# Altium PCB BridgeBoardNoRC.PcbDoc
Units mil, origin at the board's own origin, x right, y up, seen from the top; angles counter-clockwise.
Board outline 3900.03 x 2110.03 mil, 2 copper layers (Top Layer, Bottom Layer); 7 components, 69 nets, 168 pads, 0 vias.
Unrouted connection lines stored in the file: 85.
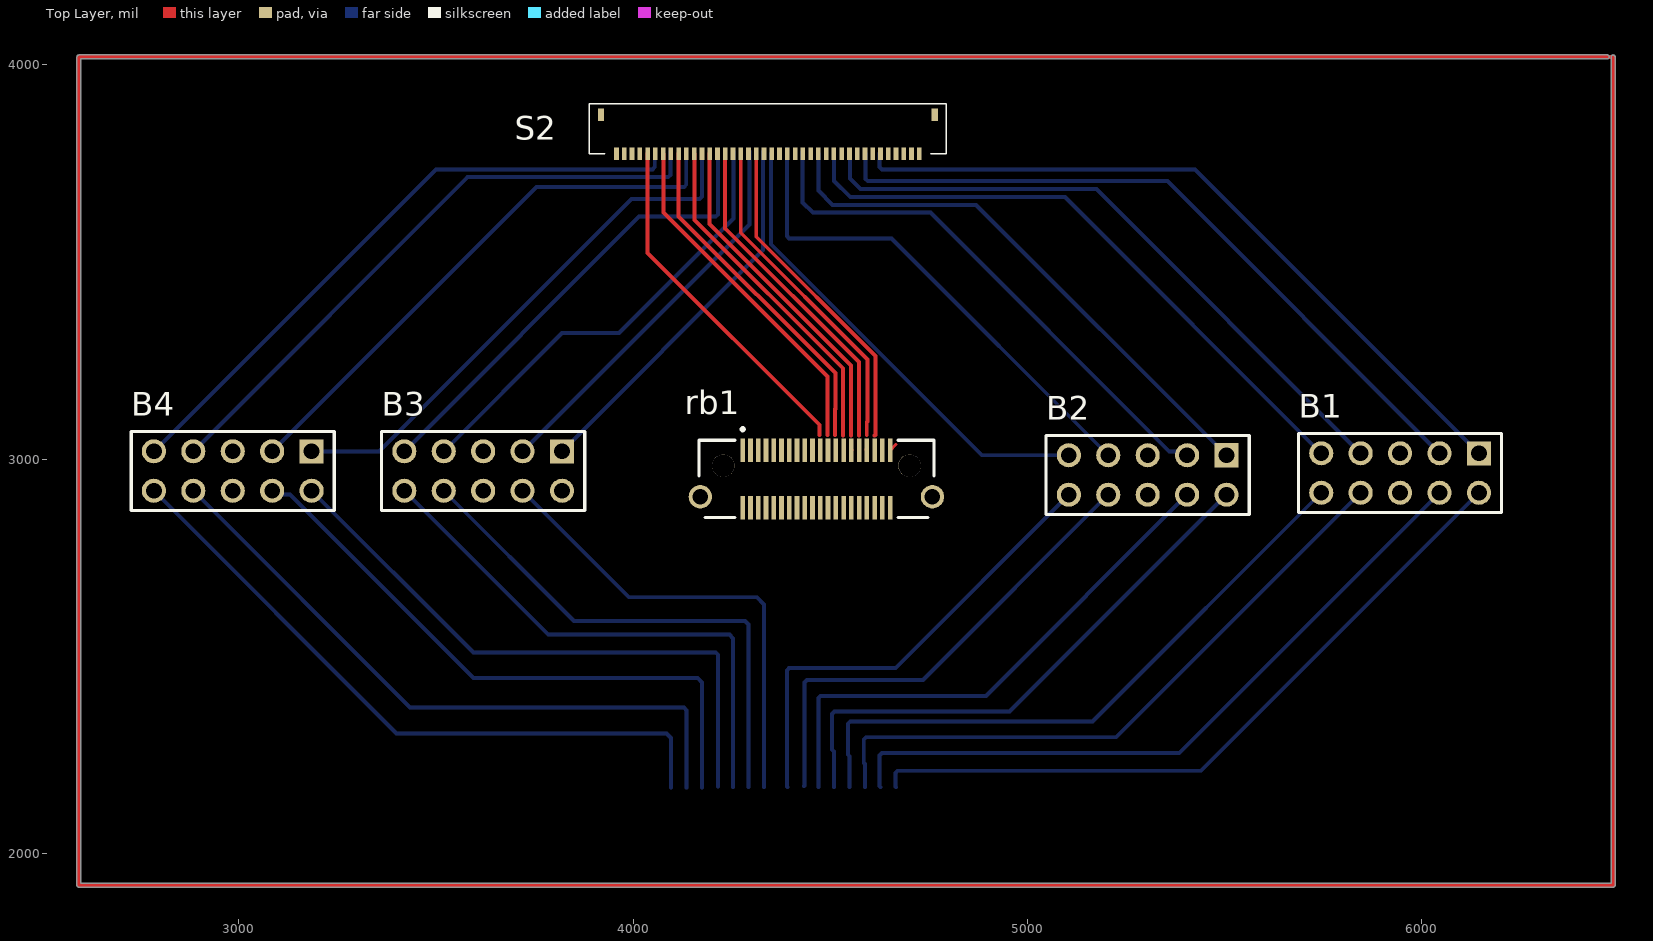
[diagram p0: Top Layer view]
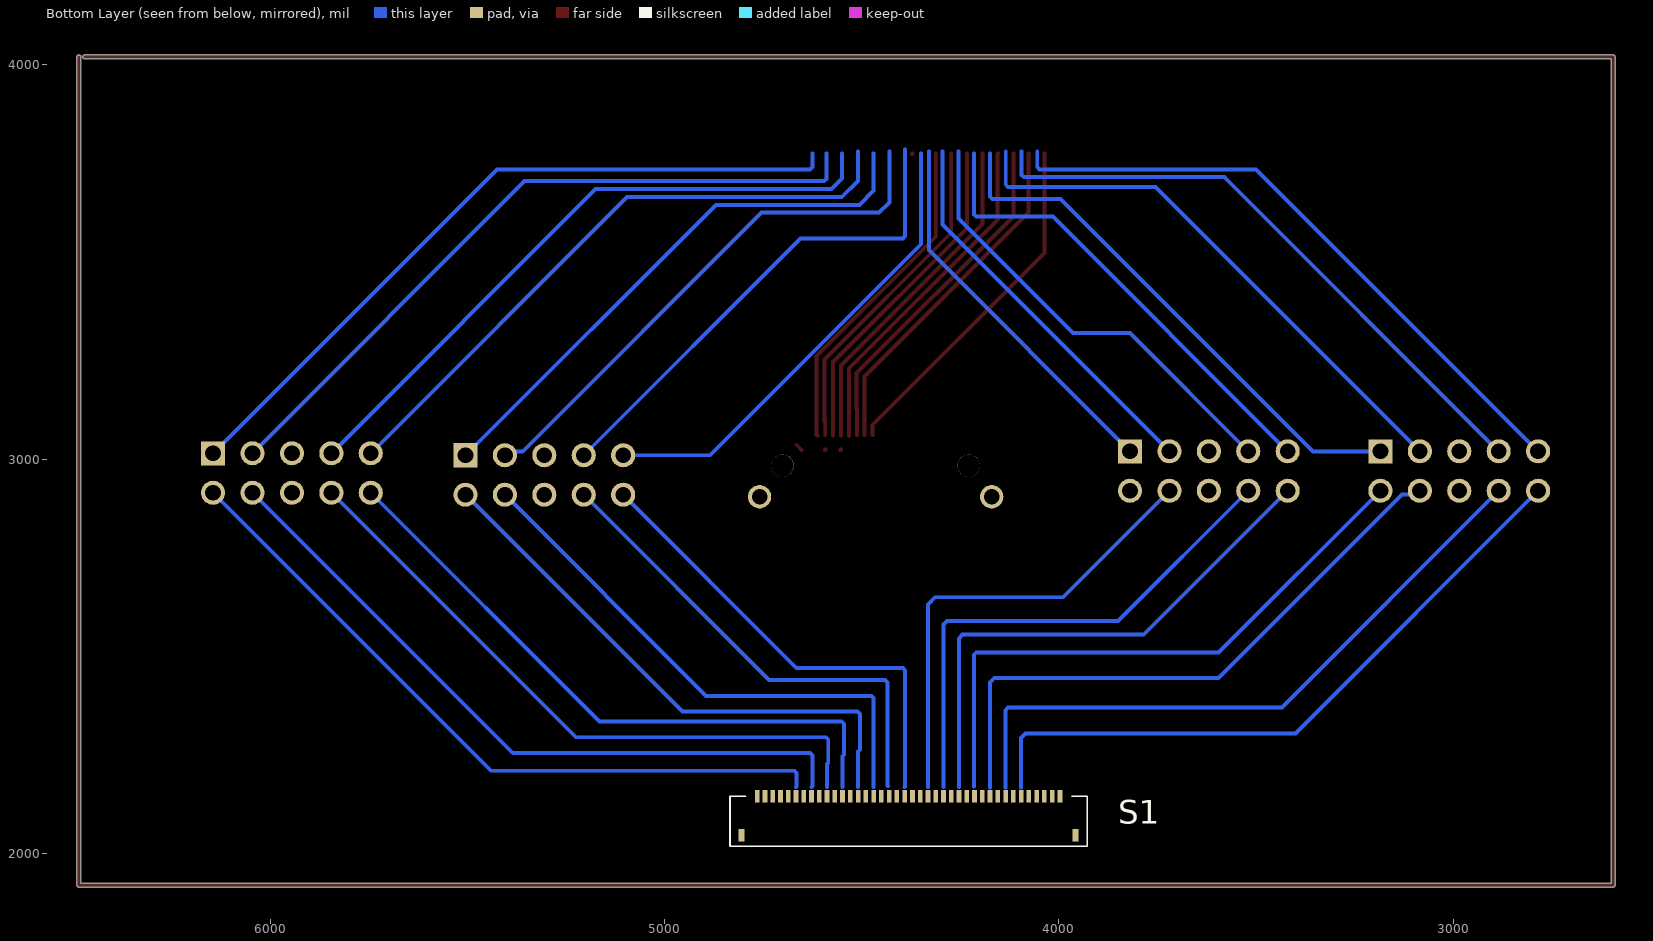
[diagram p1: Bottom Layer view, seen from below]

## Layer stack, top to bottom
Top Solder: solder mask 0.4, Solder Resist, Dk 3.5
Top Layer: signal copper 1.4
Dielectric 1: dielectric 12.6, FR-4, Dk 4.8
Bottom Layer: signal copper 1.4
Bottom Solder: solder mask 0.4, Solder Resist, Dk 3.5

## Board outline
2589.99,1920 2589.99,4020 cw(c2595,4020) 2595,4025.01 6470,4025.01 cw(c6470,4020) 6475.02,4020 cw(c6470,4020) 6470,4014.99 2600.01,4014.99 2600.01,1925.02 6479.98,1925.02 6479.98,4020 cw(c6485,4020) 6490.02,4020 6490.02,1920 cw(c6485,1920) 6485,1914.98 2595,1914.98 cw(c2595,1920)

## Design rules (kind name [scope] priority, off if disabled: settings)
Clearance [All] p1: gap=10 ignorepadtopadclearanceinfootprint=FALSE except(0: Arc-Hole Track-Hole SMDPad-Hole THPad-Hole Via-Hole Fill-Hole Poly-Hole Region-Hole Text-Hole)
PolygonConnect [All] p1: connectstyle=Relief reliefconductorwidth=10 reliefentries=4 polygonreliefangle="90 Angle" airgapwidth=10
RoomDefinition BoardForIV [InComponentClass('BoardForIV')] p1: confinementstyle=ConfineIn formatcopy=TRUE lockcomponents=FALSE outline 2600,1920 6485,1920 6485,4020 2600,4020
RoutingVias [All] p1: holewidth=28 width=50 viastyle="Through Hole" minholewidth=28 minwidth=50 maxholewidth=28 maxwidth=50
SolderMaskExpansion [All] p1: expansion=4 istentingtop=FALSE
Width [All] p1: maxlimit=10 minlimit=10 preferedwidth=10
30 further rules are at their usual default settings.

## Classes and differential pairs
component class BoardForIV: B1 B2 B4 rb1 S1 S2

## Components (designator, comment, footprint, x,y, rotation, side; value= is the part's Value field where it differs from the comment)
B1 "TSW-105-05-F-D" SMTC-TSW-105-05-X-D 6145,3015 r180 top
B2 "TSW-105-05-F-D" SMTC-TSW-105-05-X-D 5505,3010 r180 top
B3 "TSW-105-05-F-D" SMTC-TSW-105-05-X-D 3820,3020 r180 top
B4 "TSW-105-05-F-D" SMTC-TSW-105-05-X-D 3185,3020 r180 top
rb1 "LSHM-120-02.5-L-DV-A-S-K-TR" SAMTEC_LSHM-120-02.5-L-DV-A-S-TR 4465,2950 r180 top
S1 "AYF534065T" AYF534065T 4381.41,2091.85 r180 bottom
S2 "AYF534065T" AYF534065T 4342.01,3828.15 r180 top

## Footprints (in the part's own frame and the unit in brackets; to place one, negate y for a bottom-side part, rotate by r counter-clockwise, add the part's x,y. Pads: shape width x height; smd on the part's side, far side on the other; paste and mask are expansions set on the pad)
AYF534065T [mm]
  rect 0.3x0.8 smd: 1(-9.75,1.35) 2(-9.25,1.35) 3(-8.75,1.35) 4(-8.25,1.35) 5(-7.75,1.35) 6(-7.25,1.35) 7(-6.75,1.35) 8(-6.25,1.35) 9(-5.75,1.35) 10(-5.25,1.35) 11(-4.75,1.35) 12(-4.25,1.35) 13(-3.75,1.35) 14(-3.25,1.35) 15(-2.75,1.35) 16(-2.25,1.35) 17(-1.75,1.35) 18(-1.25,1.35) 19(-0.75,1.35) 20(-0.25,1.35) 21(0.25,1.35) 22(0.75,1.35) 23(1.25,1.35) 24(1.75,1.35) 25(2.25,1.35) 26(2.75,1.35) 27(3.25,1.35) 28(3.75,1.35) 29(4.25,1.35) 30(4.75,1.35) 31(5.25,1.35) 32(5.75,1.35) 33(6.25,1.35) 34(6.75,1.35) 35(7.25,1.35) 36(7.75,1.35) 37(8.25,1.35) 38(8.75,1.35) 39(9.25,1.35) 40(9.75,1.35)
  rect 0.4x0.8 smd: MP1(-10.75,-1.15) MP2(10.75,-1.15)
  silkscreen extent -11.5,-1.85 11.5,1.35
SAMTEC_LSHM-120-02.5-L-DV-A-S-TR [mm]
  rect 0.3x1.5 smd: 01(4.75,-1.85) 02(4.75,1.85) 03(4.25,-1.85) 04(4.25,1.85) 05(3.75,-1.85) 06(3.75,1.85) 07(3.25,-1.85) 08(3.25,1.85) 09(2.75,-1.85) 10(2.75,1.85) 11(2.25,-1.85) 12(2.25,1.85) 13(1.75,-1.85) 14(1.75,1.85) 15(1.25,-1.85) 16(1.25,1.85) 17(0.75,-1.85) 18(0.75,1.85) 19(0.25,-1.85) 20(0.25,1.85) 21(-0.25,-1.85) 22(-0.25,1.85) 23(-0.75,-1.85) 24(-0.75,1.85) 25(-1.25,-1.85) 26(-1.25,1.85) 27(-1.75,-1.85) 28(-1.75,1.85) 29(-2.25,-1.85) 30(-2.25,1.85) 31(-2.75,-1.85) 32(-2.75,1.85) 33(-3.25,-1.85) 34(-3.25,1.85) 35(-3.75,-1.85) 36(-3.75,1.85) 37(-4.25,-1.85) 38(-4.25,1.85) 39(-4.75,-1.85) 40(-4.75,1.85)
  round 1.5 hole 1: S1(-7.475,1.15) S2(7.475,1.15)
  round 1.45 hole 1.45 unplated: ""(-6,-0.85) ""(6,-0.85)
  silkscreen extent -7.57,-3.3 7.57,2.49
SMTC-TSW-105-05-X-D [mm] ".025 SQ Post Terminal Strip Assembly, 2x5 Pins, Vertical, 2.54mm Pitch, Male"
  rect 1.55x1.55 hole 1.02: 1(0,0)
  round 1.55 hole 1.02: 2(0,2.54) 3(2.54,0) 4(2.54,2.54) 5(5.08,0) 6(5.08,2.54) 7(7.62,0) 8(7.62,2.54) 9(10.16,0) 10(10.16,2.54)
  silkscreen extent -1.46,-1.27 11.62,3.81, body extent -1.27,-1.27 11.43,3.81, height 5.21

## Part data
B1 B2 B3 B4: library part CMP-1024-00360-1, "0.025\" SQ Post Header, Through-hole, Vertical, -55 to 125 degC, 2.54 mm Pitch, 10-Pin, Male, RoHS", Manufacturer=Samtec, Temperature Range="-55 to 125 degC", ComponentLink1Description="Manufacturer URL", ComponentLink1URL=http://www.samtec.com, ComponentLink2Description=Datasheet, ComponentLink2URL=http://www.samtec.com/documents/webfiles/pdf/TSW_TH.PDF, ComponentLink3Description="Package Specification", ComponentLink3URL=http://www.samtec.com/documents/webfiles/cpdf/TSW-XXX-XX-XXX-X-XX-XXX-MKT.pdf, DatasheetVersion=F-214, Mounting Technology=Through-hole, Orientation=Vertical, PackageDescription=".025[0.64] SQ. Post Terminal Strip Assembly", PackageReference=TSW-105-05-X-D, PackageVersion="DM, 8/1988", PartNumber=TSW-105-05-F-D, Pitch="2.54 mm", RoHS=True
rb1: "razor beam 40"
S1 S2: library part AYF534035

## Nets (pads, with @x,y where several pads share a name; then routed paths per layer and width w, separated by ;. In a path a pad name is that pad's centre, name@x,y a point inside that pad or via, vN(x,y) a via of type N, cw(c..) or ccw(c..) an arc to the next point about the centre after c; other vN are vias at no path point)
GND: B1.5 B1.6 B2.5 B2.6 B3.5 B3.6 B4.5 B4.6 S1.1 S1.2 S1.3 S1.37 S1.40 S1.MP1 S1.MP2 S2.1 S2.2 S2.3 S2.37 S2.40 S2.MP1 S2.MP2
S1_A1: rb1.19 S1.5
S1_A2: rb1.17 S1.7
S1_A3: rb1.15 S1.9
S1_A4: rb1.13 S1.11
S1_A5: rb1.11 S1.13
S1_A6: S1.15
S1_A7: S1.17
S1_A8: S1.19
S1_A9: rb1.20 S1.22
S1_A10: rb1.18 S1.24
S1_A11: rb1.16 S1.26
S1_A12: rb1.14 S1.28
S1_A13: rb1.12 S1.30
S1_A14: rb1.10 S1.32
S1_A15: S1.34
S1_A16: S1.36
S1_K1: B1.2 S1.6 | length 1811.2
  Bottom Layer w10: 4666.84,2168.18 4665,2170.02 4665,2204.14 4670.86,2210 5440,2210 B1.2
S1_K2: B1.4 S1.8 | length 1777.8
  Bottom Layer w10: 4627.47,2168.18 4625,2170.65 4625,2249.14 4630.86,2255 5385,2255 B1.4
S1_K3: B1.8 S1.10 | length 1641.5
  Bottom Layer w10: 4588.1,2168.18 4588.1,2227.11 4585,2230.21 4585,2289.14 4590.86,2295 5225,2295 B1.8
S1_K4: B1.10 S1.12 | length 1605.2
  Bottom Layer w10: 4548.73,2168.18 4548.73,2246.8 4545,2250.53 4545,2329.14 4550.86,2335 5165,2335 B1.10
S1_K5: B2.2 S1.14 | length 1418
  Bottom Layer w10: 4509.36,2168.18 4509.36,2258.98 4505,2263.34 4505,2354.14 4510.86,2360 4955,2360 B2.2
S1_K6: B2.4 S1.16 | length 1374.6
  Bottom Layer w10: 4470,2168.19 4470,2394.14 4475.86,2400 4895,2400 B2.4
S1_K7: B2.8 S1.18 | length 1230.5
  Bottom Layer w10: 4433.72,2171.28 4435,2172.56 4435,2434.14 4440.86,2440 4735,2440 B2.8
S1_K8: B2.10 S1.20 | length 1196.9
  Top Layer w10: B2.10@5104.49,2909.49 B2.10
  Bottom Layer w10: 4391.25,2168.18 4390,2169.43 4390,2464.14 4395.86,2470 4665,2470 B2.10
S1_K9: B3.2 S1.21
S1_K10: B3.4 S1.23 | length 1195.3
  Bottom Layer w10: B3.4 3990,2650 4314.14,2650 4332.2,2631.94 4332.2,2168.18
S1_K11: B3.8 S1.25 | length 1334.3
  Bottom Layer w10: B3.8@3528.09,2920 B3.8 3850,2590 4284.14,2590 4292.83,2581.31 4292.83,2168.18
S1_K12: B3.10 S1.27 | length 1366
  Bottom Layer w10: B3.10 3785,2555 4244.14,2555 4253.46,2545.68 4253.46,2168.18
S1_K13: B4.2 S1.29 | length 1536.4
  Bottom Layer w10: B4.2 3595,2510 4209.14,2510 4215,2504.14 4215,2170
S1_K14: B4.4 S1.31 | length 1557.8
  Bottom Layer w10: B4.4 3094.76,2910.24 3130.4,2910.24 3595.64,2445 4164.14,2445 4175.2,2433.94 4175.2,2167.69
S1_K15: B4.8 S1.33 | length 1677
  Bottom Layer w10: B4.8 3435,2370 4129.14,2370 4135.83,2363.31 4135.83,2167.7
S1_K16: B4.10 S1.35 | length 1710.6
  Top Layer w10: B4.10 B4.10@2794.76,2929.76
  Bottom Layer w10: B4.10 3400,2305 4085,2305 4096.46,2293.54 4096.46,2167.7
S2_A1: rb1.36 S2.5
S2_A2: rb1.34 S2.7
S2_A3: rb1.32 S2.9
S2_A4: rb1.30 S2.11
S2_A5: rb1.28 S2.13
S2_A6: rb1.26 S2.15
S2_A7: rb1.24 S2.17
S2_A8: rb1.22 S2.19 | length 1.7
  Top Layer w10: S2.19 S2.19@4372.76,3773.78
S2_A9: rb1.35 S2.22 | length 841.1
  Top Layer w10: S2.22 4312.48,3563.99 4614.53,3261.94 4614.53,3061.69 4612.64,3059.8
S2_A10: rb1.33 S2.24 | length 850.1
  Top Layer w7: rb1.33 rb1.33@4593.23,3023.11
  Top Layer w10: S2.24 4273.11,3574.22 4594.53,3252.8 4594.53,3095.98 4592.64,3094.09 4592.64,3060.92 ; rb1.33@4591.73,3024.06 rb1.33
S2_A11: rb1.31 S2.26 | length 855.8
  Top Layer w10: S2.26 4233.74,3585.3 4572.95,3246.09 4572.95,3102.69 4572.64,3102.38 4572.64,3059.8
S2_A12: rb1.29 S2.28 | length 865.3
  Top Layer w10: S2.28 4194.37,3596.39 4552.95,3237.81 4552.95,3110.98 4552.64,3110.66 4552.64,3060.13 ; rb1.29@4552.36,3024.06 rb1.29
S2_A13: rb1.27 S2.30 | length 871.1
  Top Layer w10: S2.30 4156.22,3773.78 4156.22,3606.25 4532.95,3229.52 4532.95,3119.26 4532.64,3118.95 4532.64,3060.62
S2_A14: rb1.25 S2.32 | length 878.6
  Top Layer w10: S2.32 4115.63,3615.45 4512.95,3218.12 4512.95,3127.55 4512.64,3127.23 4512.64,3061.08
S2_A15: rb1.23 S2.34 | length 886.2
  Top Layer w10: S2.34 4077.48,3773.78 4077.48,3625.31 4492.95,3209.84 4492.95,3135.83 4492.64,3135.52 4492.64,3061.51
S2_A16: rb1.21 S2.36 | length 893.6
  Top Layer w10: S2.36 4036.89,3523.11 4472.64,3087.36 4472.64,3061.9
S2_K1: B1.1 S2.6 | length 1854.8
  Bottom Layer w10: 4625,3775 4625,3740.86 4630.86,3735 5425,3735 B1.1
S2_K2: B1.3 S2.8 | length 1821.6
  Top Layer w10: B1.3@6035.24,3024.76 B1.3
  Bottom Layer w10: 4590,3775.43 4590,3710.86 4595.86,3705 5355,3705 B1.3
S2_K3: B1.7 S2.10 | length 1646.9
  Bottom Layer w10: 4550,3775 4550,3711.72 4576.72,3685 5175,3685 B1.7
S2_K4: B1.9 S2.12 | length 1595.3
  Bottom Layer w10: 4510,3780 4510,3705.86 4550.86,3665 5095,3665 B1.9
S2_K5: B2.1 S2.14 | length 1407
  Bottom Layer w10: 4470,3775 4470,3680.86 4505.86,3645 4870,3645 B2.1
S2_K6: B2.3 S2.16 | length 1369.6
  Bottom Layer w10: 4430,3780 4430,3650.86 4455.86,3625 4754.36,3625 5359.6,3019.76 5395.24,3019.76 B2.3
S2_K7: B2.7 S2.18 | length 1278.2
  Top Layer w10: B2.7@5195.24,3019.76 B2.7
  Bottom Layer w10: 4390,3785 4390,3565.86 4395.86,3560 4655,3560 B2.7
S2_K8: B2.9 S2.20 | length 1206.6
  Bottom Layer w10: 4350,3775 4350,3545 4885,3010 B2.9
S2_K9: B3.1 S2.21 | length 971.2
  Bottom Layer w10: B3.1 4330,3530 4330,3780
S2_K10: B3.3 S2.23 | length 998.2
  Bottom Layer w10: B3.3 4295,3595 4295,3780
S2_K11: B3.7 S2.25 | length 1148.9
  Bottom Layer w10: B3.7 3820.31,3320.31 3964.45,3320.31 4255,3610.86 4255,3780
S2_K12: B3.9 S2.27 | length 1211.8
  Top Layer w10: B3.9 B3.9@3429.76,3029.76
  Bottom Layer w10: B3.9 4015,3615 4209.14,3615 4215,3620.86 4215,3775
S2_K13: B4.1 S2.29 | length 1366.7
  Bottom Layer w10: B4.1 3355.64,3020 3995.64,3660 4169.14,3660 4175,3665.86 4175,3775
S2_K14: B4.3 S2.31 | length 1414.1
  Bottom Layer w10: B4.3 3755,3690 4129.14,3690 4135,3695.86 4135,3780
S2_K15: B4.7 S2.33 | length 1559.4
  Bottom Layer w10: B4.7 3580,3715 4089.14,3715 4095,3720.86 4095,3780
S2_K16: B4.9 S2.35 | length 1621.5
  Top Layer w10: B4.9 B4.9@2794.76,3029.76
  Bottom Layer w10: B4.9 3500,3735 4049.14,3735 4055,3740.86 4055,3780
tec+1: S1.38 S1.39
tec+2: rb1.38 rb1.40 S2.38 S2.39
therA1: S1.4
therA2: rb1.39 S2.4 | length 20.9
  Top Layer w8: rb1.39 4666.81,3037.64
pads on no net: rb1. rb1.01 rb1.02 rb1.03 rb1.04 rb1.05 rb1.06 rb1.07 rb1.08 rb1.09 rb1.37 rb1.S1 rb1.S2
copper on no net: | length 11980
  Top Layer w10: 2595,1920 6485,1920 6485,4020 6470,4020 2595,4020 2595,1920